# EAGLE board Honey_v2_a (EAGLE 7.2.0)
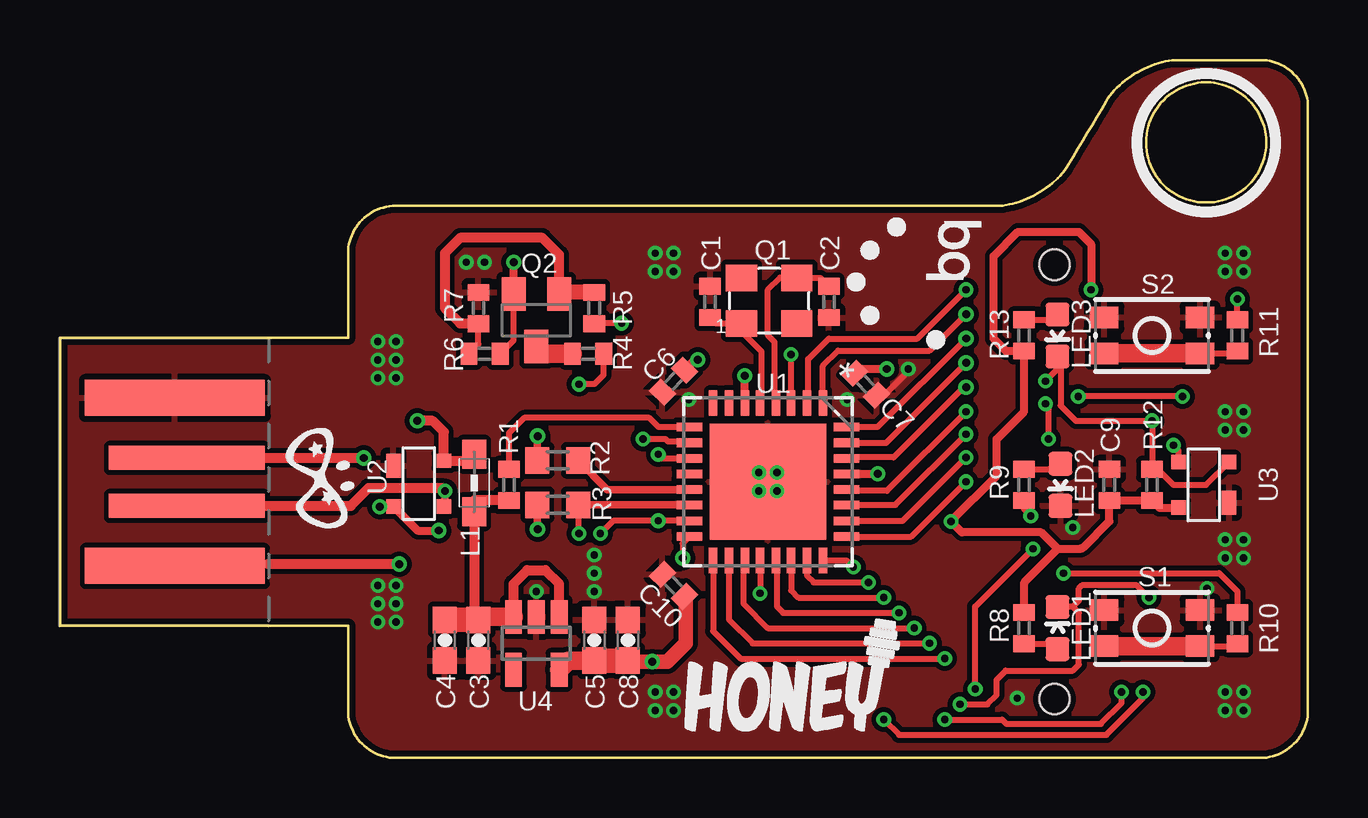
[diagram p0: board, top side]
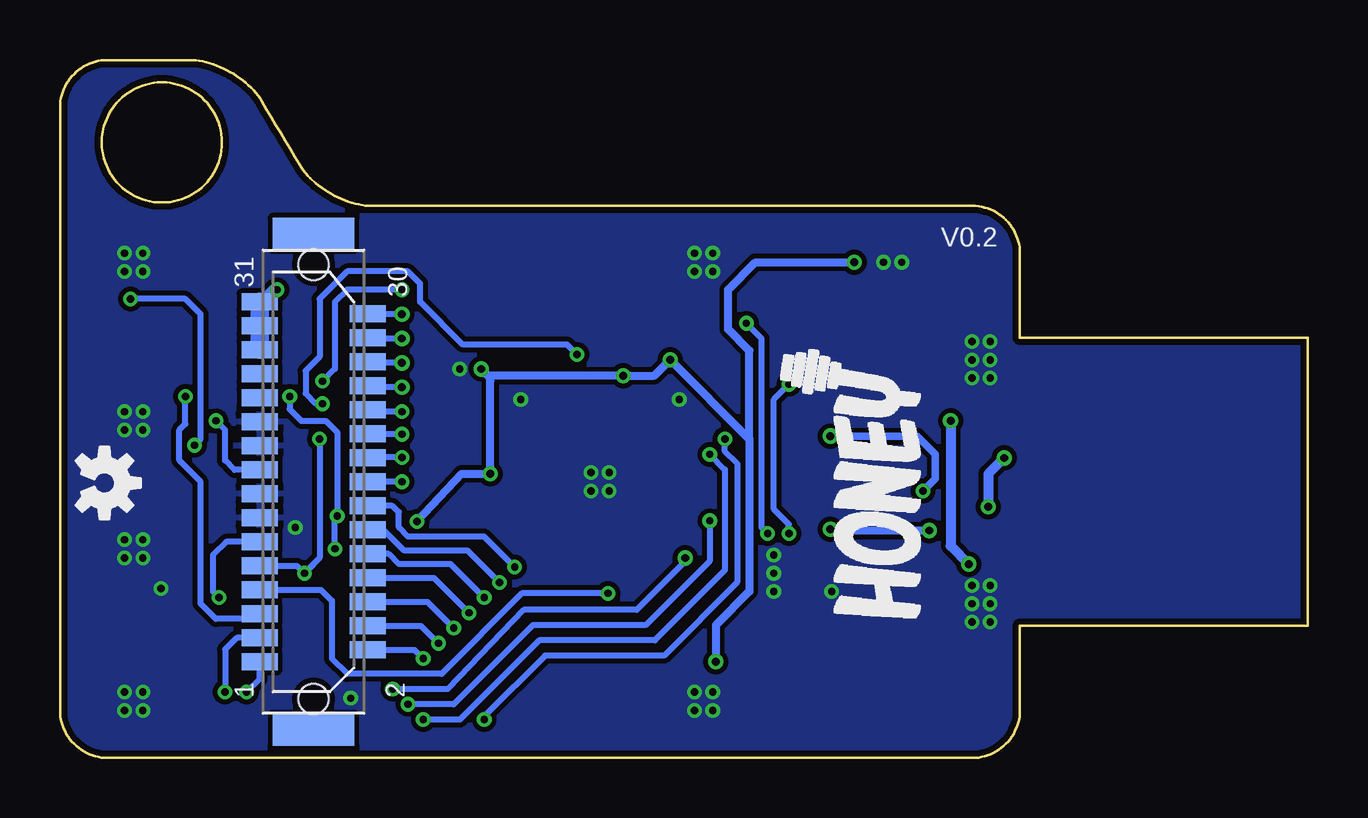
[diagram p1: board, bottom side, seen from below]

Size 52 x 29.08 mm. Coordinates in mm from the lower left corner, seen from the top.
Outline: 50.26,25.47 50.24,25.3 50.2,25.14 50.17,24.98 50.12,24.82 50.06,24.67 50,24.52 49.92,24.38 49.83,24.24 49.74,24.11 49.64,23.99 49.41,23.76 49.29,23.66 49.02,23.48 48.88,23.4 48.73,23.34 48.58,23.27 48.42,23.23 48.26,23.19 48.1,23.16 47.93,23.14 47.58,23.14 47.41,23.16 47.25,23.19 47.09,23.23 46.93,23.27 46.78,23.34 46.63,23.4 46.49,23.48 46.36,23.57 46.22,23.66 46.1,23.76 45.87,23.99 45.77,24.11 45.68,24.24 45.59,24.38 45.52,24.52 45.45,24.67 45.39,24.82 45.34,24.98 45.31,25.14 45.27,25.3 45.26,25.47 45.26,25.81 45.27,25.98 45.31,26.15 45.34,26.31 45.39,26.47 45.45,26.61 45.52,26.76 45.59,26.91 45.77,27.17 45.87,27.3 45.99,27.41 46.1,27.52 46.22,27.62 46.36,27.71 46.49,27.8 46.63,27.88 46.78,27.95 46.93,28.01 47.09,28.06 47.25,28.09 47.41,28.12 47.58,28.14 47.93,28.14 48.1,28.12 48.42,28.06 48.58,28.01 48.73,27.95 48.88,27.88 49.02,27.8 49.29,27.62 49.41,27.52 49.52,27.41 49.64,27.3 49.74,27.17 49.92,26.91 50,26.76 50.06,26.61 50.12,26.47 50.17,26.31 50.24,25.98 50.26,25.81 50.26,25.47
Outline: 50.14,29.08 46.48,29.08 46.34,29.07 46.2,29.04 46.05,29.02 45.91,28.99 45.76,28.94 45.62,28.9 45.47,28.85 45.19,28.72 45.04,28.65 44.91,28.57 44.77,28.5 44.64,28.41 44.51,28.32 44.38,28.23 44.26,28.13 44.15,28.03 44.04,27.93 43.94,27.82 43.84,27.71 43.75,27.59 43.67,27.48 43.6,27.36 43.4,27.03 43.2,26.7 43,26.37 42.81,26.04 42.61,25.71 42.41,25.38 42.21,25.05 42.02,24.72 41.95,24.6 41.86,24.48 41.68,24.26 41.57,24.15 41.35,23.95 41.23,23.85 41.1,23.76 40.98,23.67 40.84,23.58 40.71,23.5 40.57,23.43 40.43,23.36 40.14,23.23 40,23.18 39.85,23.14 39.7,23.09 39.56,23.06 39.27,23.01 39.13,23 13.86,23 13.73,22.99 13.6,22.96 13.47,22.93 13.34,22.89 13.1,22.79 12.99,22.73 12.88,22.66 12.78,22.59 12.68,22.5 12.59,22.41 12.5,22.32 12.41,22.22 12.34,22.12 12.27,22.01 12.21,21.9 12.11,21.66 12.07,21.53 12.04,21.4 12.01,21.27 12,21.14 12,17.5 0,17.5 0,5.5 12,5.5 12,1.86 12.01,1.73 12.04,1.6 12.07,1.47 12.11,1.34 12.21,1.1 12.27,0.99 12.34,0.88 12.41,0.78 12.5,0.68 12.59,0.59 12.68,0.5 12.78,0.41 12.88,0.34 12.99,0.27 13.1,0.21 13.22,0.16 13.34,0.11 13.47,0.07 13.6,0.04 13.73,0.01 13.86,0 50.14,0 50.27,0.01 50.4,0.04 50.53,0.07 50.66,0.11 50.78,0.16 50.9,0.21 51.01,0.27 51.12,0.34 51.22,0.41 51.32,0.5 51.41,0.59 51.5,0.68 51.59,0.78 51.66,0.88 51.73,0.99 51.79,1.1 51.84,1.22 51.89,1.34 51.93,1.47 51.96,1.6 51.99,1.73 52,1.86 52,27.22 51.99,27.35 51.96,27.48 51.93,27.61 51.89,27.74 51.84,27.85 51.79,27.97 51.73,28.09 51.66,28.19 51.59,28.3 51.5,28.4 51.41,28.49 51.32,28.58 51.22,28.66 51.12,28.74 51.01,28.81 50.9,28.87 50.78,28.92 50.66,28.97 50.53,29.01 50.4,29.04 50.27,29.06 50.14,29.08
Copper layers (1*16): Top 0.035mm / dielectric 1.5mm / Bottom 0.035mm
Design rules "pighixxx_CAM_DRC_V1.0": minimum track width 6mil, minimum drill 12mil, track to track 6mil, track to pad 6mil, pad to pad 6mil, via to via 6mil, smd to smd 0mil, copper to edge 10mil, drill to drill 10mil, minimum pad ring 10mil, minimum via ring 6mil, stop-mask expansion 2mil, vias tented up to drill 100mil, thermal gap 10mil
Net classes: 0 default: width 0.254 mm, drill 0.254 mm, clearance 0.203 mm

## Footprints (pad centres in the part's own frame; a part is rotated, then mirrored left to right if it is on the bottom)
C0402 = smd 0.7 x 0.9: 1 -0.65,0; 2 0.65,0
0603-CAP = smd 1.1 x 1: 1 -0.85,0; 2 0.85,0
USB-A-PCB = smd 7.5 x 1.5: 5V -0.2,-3.5; GND -0.2,3.5 | smd 6.5 x 1: USB_M 0.3,-1; USB_P 0.3,1
0805 = smd 1.2 x 1: 1 -1.2,0; 2 1.2,0
LED-0603 = smd 1 x 1: A 0,-0.877; C 0,0.877
CRYSTAL_3.2X2.5 = smd 1.3 x 1.1: 1 -1.1,-0.9; 2 1.2,-0.9; 3 1.2,1; 4 -1.1,1
SOT23-BEC = smd 1 x 1.4: B -0.95,-1.1; C 0,1.1; E 0.95,-1.1
R0402 = smd 0.7 x 0.9: 1 -0.65,0; 2 0.65,0
R0603 = smd 1 x 1.1: 1 -0.85,0; 2 0.85,0
MINI_PUSHBUTTON = smd 1.2 x 0.9: 1 -2,0.75; 2 2,0.75; 3 -2,-0.75; 4 2,-0.75
QFN65P700X700X100-33N = smd 1.067 x 0.356: 1 -3.277,2.286; 2 -3.277,1.626; 3 -3.277,0.965; 4 -3.277,0.33; 5 -3.277,-0.33; 6 -3.277,-0.965; 7 -3.277,-1.626; 8 -3.277,-2.286; 17 3.277,-2.286; 18 3.277,-1.626; 19 3.277,-0.965; 20 3.277,-0.33; 21 3.277,0.33; 22 3.277,0.965; 23 3.277,1.626; 24 3.277,2.286 | smd 0.356 x 1.067: 9 -2.286,-3.277; 10 -1.626,-3.277; 11 -0.965,-3.277; 12 -0.33,-3.277; 13 0.33,-3.277; 14 0.965,-3.277; 15 1.626,-3.277; 16 2.286,-3.277; 25 2.286,3.277; 26 1.626,3.277; 27 0.965,3.277; 28 0.33,3.277; 29 -0.33,3.277; 30 -0.965,3.277; 31 -1.626,3.277; 32 -2.286,3.277 | smd 4.851 x 4.851: 33 0,0
SOT-143B = smd 1 x 0.6: 1 -0.75,-1.05 | smd 0.6 x 0.6: 2 0.95,-1.05; 3 0.95,1.05; 4 -0.95,1.05
SOT23-5 = smd 0.7 x 1.4: 1 0.95,1.1; 2 0,1.1; 3 -0.95,1.1; 4 -0.95,-1.1; 5 0.95,-1.1
DF9-31S = smd 0.7 x 1.5: 1 -7.5,2.25; 2 -7,-2.25; 3 -6.5,2.25; 4 -6,-2.25; 5 -5.5,2.25; 6 -5,-2.25; 7 -4.5,2.25; 8 -4,-2.25; 9 -3.5,2.25; 10 -3,-2.25; 11 -2.5,2.25; 12 -2,-2.25; 13 -1.5,2.25; 14 -1,-2.25; 15 -0.5,2.25; 16 0,-2.25; 17 0.5,2.25; 18 1,-2.25; 19 1.5,2.25; 20 2,-2.25; 21 2.5,2.25; 22 3,-2.25; 23 3.5,2.25; 24 4,-2.25; 25 4.5,2.25; 26 5,-2.25; 27 5.5,2.25; 28 6,-2.25; 29 6.5,2.25; 30 7,-2.25; 31 7.5,2.25 | smd 1.3 x 3.4: M1 -10.35,0; M2 10.35,0 | hole 1.27: 9.05,0; -9.05,0

## Placement (x,y rotation side)
C1  18pF  [C0402]  27.09,19 90 top
C2  18pF  [C0402]  32.04,19 270 top
C3  1µF  [0603-CAP]  17.43,4.9 90 top
C4  10µF  [0603-CAP]  16.04,4.9 90 top
C5  1µF  [0603-CAP]  22.26,4.9 270 top
C6  0.1µF  [C0402]  25.56,15.7 225 top
C7  0.1µF  [C0402]  33.56,15.57 315 top
C8  10µF  [0603-CAP]  23.66,4.9 270 top
C9  0.1µF  [C0402]  43.72,11.38 90 top
C10  0.1µF  [C0402]  25.56,7.19 135 top
J1  USBPCB  [USB-A-PCB]  4.99,11.5 0 top
L1  MI0805K400R-10  [0805]  17.26,11.45 270 top
LED1  [LED-0603]  41.56,5.41 0 top
LED2  [LED-0603]  41.69,11.38 180 top
LED3  [LED-0603]  41.56,17.6 180 top
LOGO1  OSHW-LOGOS  [OSHW-LOGO-S]  50.15,11.45 270 bottom
Q1  12MHz 4 pad crystal 3.2x2.5  [CRYSTAL_3.2X2.5]  29.5,19 0 top
Q2  BC857  [SOT23-BEC]  19.85,18.24 180 top
R1  2K  [R0402]  18.7,11.38 90 top
R2  33  [R0603]  20.74,12.39 0 top
R3  33  [R0603]  20.74,10.54 0 top
R4  1.5K  [R0402]  22.01,16.84 180 top
R5  2K  [R0402]  22.26,18.74 270 top
R6  24K  [R0402]  17.69,16.84 180 top
R7  NC  [R0402]  17.43,18.74 90 top
R8  2K  [R0402]  40.17,5.41 270 top
R9  2K  [R0402]  40.17,11.38 90 top
R10  2K  [R0402]  49.06,5.41 270 top
R11  2K  [R0402]  49.06,17.6 270 top
R12  10K  [R0402]  45.5,11.38 90 top
R13  2K  [R0402]  40.17,17.6 90 top
S1  BOOT  [MINI_PUSHBUTTON]  45.5,5.41 0 top
S2  RESET  [MINI_PUSHBUTTON]  45.5,17.6 0 top
U1  LPC11U35FHN33/401  [QFN65P700X700X100-33N]  29.5,11.5 270 top
U2  PRTR5V0U2X  [SOT-143B]  14.94,11.43 270 top
U3  MIC6315  [SOT-143B]  47.66,11.38 90 top
U4  AP2112K-3.3TRG1 3.3V  [SOT23-5]  19.85,4.77 0 top
U$3  [BQ_LOGO_SMALL]  38.39,17.04 90 top
U$4  [PIGHIXXX_LOGO]  12.25,9.57 90 top
U$5  [LOGO_MEDIUM]  26.04,1.09 0 top
U$6  [LOGO_BIG]  16.11,5.84 90 bottom
X1  DF9-31S  [DF9-31S]  41.44,11.5 90 bottom

## Library data of the parts
C1 C2 C6 C7 C9 C10 R1-R13 = resistor
C3-C5 C8 = SparkFun-Passives
J1 = SparkFun-Connectors
L1 = Honey_v2; MPN: 74279201; OC_FARNELL: 1635708; OC_NEWARK: 08P2359; PACKAGE: IND-0805; SUPPLIER: Wuerth Elektronik
LED1-LED3 = SparkFun-LED
LOGO1 = SparkFun-Aesthetics
Q1 U4 = GHI
Q2 = transistor
S1 S2 = GHI2
U1 = Honey_v2; MPN: LPC11U35FHN33/401; OC_FARNELL: 2115659; OC_NEWARK: 24W5343; PACKAGE: HVQFN33; SUPPLIER: NXP
U2 = Honey_v2; APPLICATIONS: General Purpose; BIDIRECTIONAL_CHANNELS: 2; CAPACITANCE: 1pF @ 1MHz; CURRENT_PEAK_PULSE: -; DESCRIPTION: TVS DIODE 5.5VWM SOT143B; DOCUMENTATION_LINK: <a href="http://www.nxp.com/documents/data_sheet/PRTR5V0U2X.pdf">Datasheet</a>; DOCUMENTATION_URL: http://www.nxp.com/documents/data_sheet/PRTR5V0U2X.pdf; MANUFACTURER: NXP Semiconductors; MOUNTING_TYPE: Surface Mount; OPERATING_TEMPERATURE: -40C ~ 85C; PART_NUMBER: PRTR5V0U2X,215; POWER-PEAK_PULSE: -; POWER_LINE_PROTECTION: Yes; SUPPLIER_ITEM_LINK: <a href="http://www.digikey.com/product-detail/en/PRTR5V0U2X,215/568-4140-1-ND/1589981">Details</a>; SUPPLIER_ITEM_NUMBER: 568-4140-1-ND; SUPPLIER_ITEM_URL: http://www.digikey.com/product-detail/en/PRTR5V0U2X,215/568-4140-1-ND/1589981; SUPPLIER_LINK: <a href="http://www.digikey.com">Home Page</a>; SUPPLIER_NAME: Digi-Key; SUPPLIER_URL: http://www.digikey.com; TYPE: Steering (Rail to Rail); UNIDIRECTIONAL_CHANNELS: -; VOLTAGE_BREAKDOWN: 6V; VOLTAGE_CLAMPING: -; VOLTAGE_REVERSE: 5.5V
U3 U$5 U$6 = Honey_v2
U$3 = new_bq
U$4 = pighiXXX
X1 = con-hirose; MPN: DF9-31S-1V(32); OC_FARNELL: 1798382; OC_NEWARK: 74R3383

## Nets
0_1: U1.30 X1.24
0_2: U1.8
0_4: U1.10 X1.3
0_5: U1.11 X1.1
0_8: U1.17 X1.2
0_9: U1.18 X1.4
0_10: U1.19 X1.6
0_11: U1.21 X1.8
0_12: U1.22 X1.10
0_13: U1.23 X1.12
0_14: U1.24 X1.14
0_15: U1.25 X1.16
0_16: U1.26 X1.18
0_18: U1.31 X1.26
0_19: U1.32 X1.28
0_20: U1.7
0_21: U1.12
0_22: U1.20 X1.7
0_23: U1.27 X1.20
1_15: U1.28 X1.22
1_19: U1.1 X1.30
3.3V: C5.2 C6.1 C7.1 C8.2 C9.1 C10.1 Q2.E R6.1 R8.1 R12.1 R13.1 U1.6 U1.29 U3.4 U4.5 X1.27 X1.29 X1.31
AD+: J1.USB_P R3.1 U2.2
AD-: J1.USB_M R2.1 U2.3
CON: LED1.C R5.2 U1.15 X1.11
D+: R3.2 R4.1 U1.14
D-: R2.2 U1.13
ENA: R10.1 U1.3 X1.9
GND: C1.2 C2.2 C3.1 C4.1 C5.1 C6.2 C7.2 C8.1 C9.2 C10.2 J1.GND LED2.C R7.2 S1.1 S1.2 S2.1 S2.2 U1.33 U2.1 U3.1 U4.2 X1.13 X1.15 X1.19 X1.21
LED: R9.1 U1.16 X1.5
N$1: Q2.C R4.2
N$2: Q2.B R5.1 R6.2 R7.1
N$12: LED2.A R9.2
N$14: R10.2 S1.3 S1.4
N$20: R11.2 S2.3 S2.4
N$22: LED1.A R8.2
N$23: LED3.A R13.2
N$26: X1.25
N$27: X1.23
RST: LED3.C R12.2 U1.2 U3.2 X1.17
RSTE: R11.1 U3.3
USBON: R1.2 U1.9
VBUS: J1.5V L1.1 U2.4
VCC: C3.2 C4.2 L1.2 R1.1 U4.1 U4.3
XIN: C2.1 Q1.3 U1.4
XOUT: C1.1 Q1.1 U1.5

## Tracks (layer width: path | path; a pad name or v marks a point on that pad's centre or on a via)
0_1  (via drill 0.33)
  Top 0.254: U1.30 arc-90 32.83,12.52 34.73,12.52 37.65,15.44 v37.75,15.44
  Bottom 0.254: v37.75,15.44 39.12,15.44 X1.24
0_4  (via drill 0.3)
  Top 0.254: U1.10 26.17,13.18 25.33,13.18 25.23,13.28 v24.29,13.28 | v34.33,1.6 34.96,0.96 43.6,0.96 45.12,2.49 v45.12,2.74
  Bottom 0.254: v24.29,13.28 24.29,12.77 23.78,12.27 23.78,7.31 26.83,4.27 31.79,4.27 34.33,1.73 v34.33,1.6 | X1.3 44.64,5 45.12,4.52 v45.12,2.74
0_5  (via drill 0.3)
  Top 0.254: U1.11 25.1,12.47 v24.93,12.65 | v36.87,1.6 39.25,1.6 39.43,1.42 43.37,1.42 44.23,2.28 v44.23,2.74
  Bottom 0.254: v24.93,12.65 24.29,12.01 24.29,7.82 27.21,4.9 32.04,4.9 35.34,1.6 v36.87,1.6 | v44.23,2.74 43.69,3.29 X1.1
0_8  (via drill 0.3)
  Top 0.254: U1.17 27.21,5.28 28.36,4.14 v36.87,4.14
  Bottom 0.254: X1.2 37.23,4.5 v36.87,4.14
0_9  (via drill 0.3)
  Top 0.254: U1.18 27.87,5.76 28.86,4.77 v36.23,4.77
  Bottom 0.254: X1.4 36.96,5.5 v36.23,4.77
0_10  (via drill 0.3)
  Top 0.254: v35.6,5.41 29.5,5.41 28.48,6.42 28.48,8.23 U1.19
  Bottom 0.254: X1.6 36.69,6.5 v35.6,5.41
0_11  (via drill 0.3)
  Top 0.254: v34.96,6.04 30.13,6.04 29.88,6.3 29.88,8.23 U1.21
  Bottom 0.254: X1.8 36.42,7.5 v34.96,6.04
0_12  (via drill 0.3)
  Top 0.254: U1.22 30.46,6.98 30.77,6.68 v34.33,6.68
  Bottom 0.254: v34.33,6.68 35.72,8.08 37.88,8.08 38.31,8.5 X1.10
0_13  (via drill 0.3)
  Top 0.254: U1.23 31.12,7.59 31.4,7.31 v33.69,7.31
  Bottom 0.254: v33.69,7.31 35.01,8.63 37.65,8.63 38.52,9.5 X1.12
0_14  (via drill 0.3)
  Top 0.254: U1.24 32.78,8.23 v33.06,7.95
  Bottom 0.254: v33.06,7.95 34.33,9.22 37.5,9.22 37.88,9.6 37.88,10.23 38.15,10.5 X1.14
0_15  (via drill 0.3)
  Top 0.254: U1.25 35.47,9.22 v37.75,11.5
  Bottom 0.254: v37.75,11.5 X1.16
0_16  (via drill 0.3)
  Top 0.254: U1.26 35.11,9.88 v37.75,12.52
  Bottom 0.254: v37.75,12.52 39.17,12.52 X1.18
0_18  (via drill 0.33)
  Top 0.254: U1.31 34.43,13.13 v37.75,16.46
  Bottom 0.254: v37.75,16.46 39.14,16.46 X1.26
0_19  (via drill 0.33)
  Top 0.254: U1.32 34.07,13.79 v37.75,17.47
  Bottom 0.254: v37.75,17.47 39.16,17.47 X1.28
0_22  (via drill 0.3)
  Top 0.254: U1.20 v29.17,6.86
  Bottom 0.254: X1.7 41.13,7 40.68,6.55 40.68,4.14 40.04,3.5 36.1,3.5 32.75,6.86 v29.17,6.86
0_23  (via drill 0.3)
  Top 0.254: U1.27 34.81,10.54 v37.75,13.49
  Bottom 0.254: v37.75,13.49 39.17,13.49 X1.20
1_15  (via drill 0.3)
  Top 0.254: v37.75,14.43 34.45,11.12 32.83,11.12 arc-90 U1.28
  Bottom 0.254: v37.75,14.43 39.11,14.43 X1.22
1_19  (via drill 0.33)
  Top 0.254: U1.1 31.79,16.33 32.42,16.97 36.23,16.97 v37.75,18.49
  Bottom 0.254: v37.75,18.49 39.17,18.49 X1.30
3.3V  (via drill 0.3, 0.33)
  Top 0.254: R6.1 18.9,17.4 Q2.E
  Top 0.33: U1.29 v34.07,11.83 | U1.6 v28.53,15.92 | v26.58,16.58 26.45,16.58 C6.1 | 23.95,4.01 C8.2 | C7.1 33.2,16.13 arc-45 33.38,16.2 v34.45,16.2 | R8.1 40.17,7.21 arc-45 40.24,7.39 41.56,8.71 | 41.56,8.71 42.47,8.71 arc45 42.65,8.79 43.72,9.85 C9.1 R12.1 45.8,10.43 U3.4 | 41.56,8.71 40.88,9.4 37.58,9.4 v37.12,9.85 39.02,11.76 39.02,13.28 40.17,14.43 R13.1 40.16,16.94 39.43,16.94 38.9,17.47 38.9,20.9 39.91,21.92 42.45,21.92 42.96,21.41 v42.96,19.51 | Q2.E 18.9,20.64 v18.91,20.65
  Top 0.61: 23.95,4.01 v24.67,4.01 25.31,4.01 26.07,4.77 26.07,6.68 C10.1
  Top 0.762: U4.5 21.17,4.05 C5.2
  Top 1.016: C5.2 C8.2
  Bottom 0.33: v37.12,9.85 35.26,11.83 v34.07,11.83 34.07,15.72 arc-45 34.15,15.9 v34.45,16.2 34.25,16 arc-45 34.07,15.92 v28.53,15.92 27.24,15.92 v26.58,16.58 23.28,13.28 | v42.96,19.51 43.06,19.63 X1.31 | 23.28,13.28 23.28,6.93 24.67,5.54 v24.67,4.01 | 23.28,13.28 23.28,16.97 24.17,17.85 24.17,19.51 23.02,20.65 v18.91,20.65
  Bottom 0.762: X1.31 X1.29 X1.27
AD+  (via drill 0.33)
  Top 0.305: R3.1 19.89,9.54 v19.9,9.52
  Top 0.33: U2.2 14.9,9.47 v15.78,9.47
  Top 0.406: J1.USB_P 12.65,12.5 v12.66,12.5 | v13.32,10.46 13.33,10.48 U2.2
  Bottom 0.33: v15.78,9.47 19.85,9.47 arc90 v19.9,9.52
  Bottom 0.406: v12.66,12.5 13.32,11.83 v13.32,10.46
AD-  (via drill 0.3, 0.33)
  Top 0.254: 16.04,10.52 U2.3
  Top 0.305: R2.1 19.89,13.4 v19.9,13.41 | v16.04,11.12 16.04,10.52
  Top 0.406: J1.USB_M 12.12,10.5 12.86,11.25 15.91,11.25 v16.04,11.12
  Bottom 0.305: v19.9,13.41 16.29,13.41 15.53,12.65 15.53,11.63 v16.04,11.12
CON  (via drill 0.3)
  Top 0.254: U1.15 v24.93,9.88 23.05,9.88 v22.51,9.35 | 41.47,6.3 arc45 LED1.C 41.58,6.3 42.2,6.3 | 42.2,6.3 42.45,6.04 42.45,3.88 42.2,3.63 39.41,3.63 39.02,3.25 39.02,2.61 38.64,2.23 v37.5,2.23 | 42.2,6.3 42.45,6.55 42.45,7.06 42.58,7.19 44.87,7.19 v45.37,6.68 | v23.4,18.11 22.28,18.11 R5.2
  Bottom 0.254: v24.93,9.88 24.93,8.2 27.59,5.54 32.29,5.54 35.6,2.23 v37.5,2.23 | X1.11 45.08,9 45.63,8.46 45.63,6.93 v45.37,6.68 | v22.51,9.35 22.77,9.6 22.77,17.47 v23.4,18.11
D+  (via drill 0.3)
  Top 0.254: R3.2 21.59,9.38 v21.63,9.35 | R4.1 22.64,16.82 22.64,15.95 22.26,15.57 v21.63,15.57
  Top 0.305: U1.14 R3.2
  Bottom 0.254: v21.63,9.35 21.63,9.73 22.26,10.36 22.26,14.93 v21.63,15.57
D-
  Top 0.305: U1.13 22.81,11.17 R2.2
ENA  (via drill 0.3)
  Top 0.254: U1.3 v30.46,16.81 | v41.82,7.69 48.3,7.69 49.06,6.93 R10.1 | v41.06,14.76 41.18,14.63 v41.18,13.28
  Bottom 0.254: v30.46,16.81 30.87,17.22 35.21,17.22 36.99,19 36.99,19.76 37.5,20.27 40.04,20.27 41.18,19.12 41.18,16.71 41.77,16.13 41.77,15.19 41.34,14.76 v41.06,14.76 | 41.44,8.08 v41.82,7.69 | X1.9 42.13,8 v41.82,7.69 | v41.82,7.69 41.18,8.33 v41.18,13.28
GND  (via drill 0.3)
  Top 0.254: C7.2 34.3,15.06 35.39,16.15
  Top 0.33: 35.39,16.15 v35.34,16.2
  other vias: 29.12,11.12 29.88,11.89 29.88,11.12 29.12,11.89 24.8,21.03 48.55,21.03 32.8,14.93 39.89,2.49 42.2,9.6 47.79,7.06 49.31,21.03 48.55,20.27 49.31,20.27 49.31,2.74 49.31,1.98 48.55,2.74 48.55,1.98 49.31,13.66 49.31,9.09 48.55,13.66 48.55,14.43 49.31,14.43 48.55,9.09 48.55,8.33 49.31,8.33 19.85,6.93 17.69,20.65 16.93,20.65 26.2,14.93 13.24,17.35 14.01,17.35 14.01,16.58 13.24,16.58 13.24,15.82 14.01,15.82 22.26,6.93 22.26,7.69 22.26,8.46 13.24,7.19 14.01,7.19 13.24,6.42 14.01,6.42 14.01,5.66 13.24,5.66 25.56,21.03 25.56,20.27 24.8,20.27 24.8,2.74 25.56,2.74 25.56,1.98 24.8,1.98
  pour Top: -0.73,18.36 -0.73,4.77 9.81,4.65 11.34,4.65 11.34,-0.81 52.99,-0.94 52.74,29.67 42.96,29.54 39.79,23.95 11.34,23.7 11.34,18.36
  pour Bottom: -0.73,4.77 11.34,4.65 11.34,-0.81 52.99,-0.94 52.74,29.67 42.96,29.54 39.79,23.95 11.34,23.7 11.34,18.36 -0.73,18.36
LED  (via drill 0.3, 0.33)
  Top 0.254: U1.16 25.94,8.94 v25.94,8.33 | v38.14,2.87 38.14,6.3 v40.55,8.71 | v40.45,10.08 40.17,10.36 R9.1 | v46.77,15.06 v42.43,15.06
  Bottom 0.254: v38.14,2.87 35.85,2.87 32.67,6.17 27.98,6.17 25.94,8.2 v25.94,8.33 | v40.55,8.71 40.55,9.98 v40.45,10.08 40.45,13.56 40.93,14.04 41.95,14.04 42.43,14.53 v42.43,15.06 | X1.5 43.9,5.79 45.5,5.79 46.14,6.42 46.14,11.5 47.03,12.39 47.03,13.66 46.77,13.92 v46.77,15.06
N$1
  Top 0.254: 20.14,16.84 Q2.C
  Top 0.762: R4.2 20.14,16.84
N$2
  Top 0.254: 20.86,19.39 Q2.B | R6.2 17.43,17.23 R7.1
  Top 0.406: Q2.B 20.8,20.97 20.1,21.66 16.67,21.66 16.04,21.03 16.04,18.74 16.67,18.11 17.42,18.11 R7.1
  Top 0.635: R5.1 20.86,19.39
N$12
  Top 0.254: R9.2 41.21,12.03 LED2.A
N$14
  Top 0.254: S1.4 49.06,4.66 R10.2
  Top 0.762: S1.3 S1.4
N$20
  Top 0.254: S2.4 49.06,16.85 R11.2
  Top 0.762: S2.3 S2.4
N$22
  Top 0.254: R8.2 41.44,4.76 LED1.A
N$23
  Top 0.254: R13.2 41.21,18.25 LED3.A
RST  (via drill 0.3)
  Top 0.254: U1.2 31.18,14.83 31.18,16.61 32.04,17.47 35.72,17.47 v37.75,19.51 | U3.2 47.76,11.38 46.39,11.38 45.74,12.03 R12.2 v45.5,14.04 42.33,14.04 41.69,14.68 41.69,16.6 LED3.C 41.56,16.2 v41.06,15.7
  Bottom 0.254: v37.75,19.51 40.04,19.51 40.55,19 40.55,16.2 v41.06,15.7 | X1.17 44.73,12 45.12,12.39 45.12,13.66 v45.5,14.04
RSTE  (via drill 0.3)
  Top 0.254: R11.1 v49.06,19.12 | U3.3 46.61,12.81 v46.39,13.03
  Bottom 0.254: v46.39,13.03 46.14,13.28 46.14,18.49 46.77,19.12 v49.06,19.12
USBON
  Top 0.254: U1.9 24.93,13.79 24.55,14.17 19.34,14.17 18.7,13.54 R1.2
VBUS  (via drill 0.33)
  Top 0.254: 8.67,8.08 J1.5V
  Top 0.406: L1.1 17.26,12.38 U2.4 15.99,13.58 15.53,14.04 v14.89,14.04 | v14.13,8.08 8.67,8.08
  Bottom 0.406: v14.89,14.04 14.89,8.84 v14.13,8.08
VCC
  Top 0.254: U4.3 19.09,6.06
  Top 0.406: U4.3 18.9,7.25 19.47,7.82 20.22,7.82 20.8,7.25 U4.1 | R1.1 17.26,10.73 L1.2 17.26,5.93 C3.2
  Top 0.762: U4.3 17.56,5.87 C3.2
  Top 1.016: C4.2 C3.2
XIN
  Top 0.254: C2.1 31.69,20 Q1.3 30.68,20.01 30.01,20.01 29.5,19.51 29.5,17.6 29.78,17.32 29.78,14.83 U1.4
XOUT
  Top 0.254: C1.1 27.34,18.1 Q1.1 28.4,17.76 29.22,16.94 29.22,14.78 U1.5

## Text on the board
bNames: V0.2